# Altium PCB wifi_breakout_PCB.PcbDoc
Units mm, origin at the board's own origin, x right, y up, seen from the top; angles counter-clockwise.
Board outline 43.81 x 27.05 mm, 4 copper layers (Top Layer, GND, VCC, Bottom Layer), stack 0.605 mm thick; 6 components, 12 nets, 136 pads, 9 vias.
Unrouted connection lines stored in the file: 3.
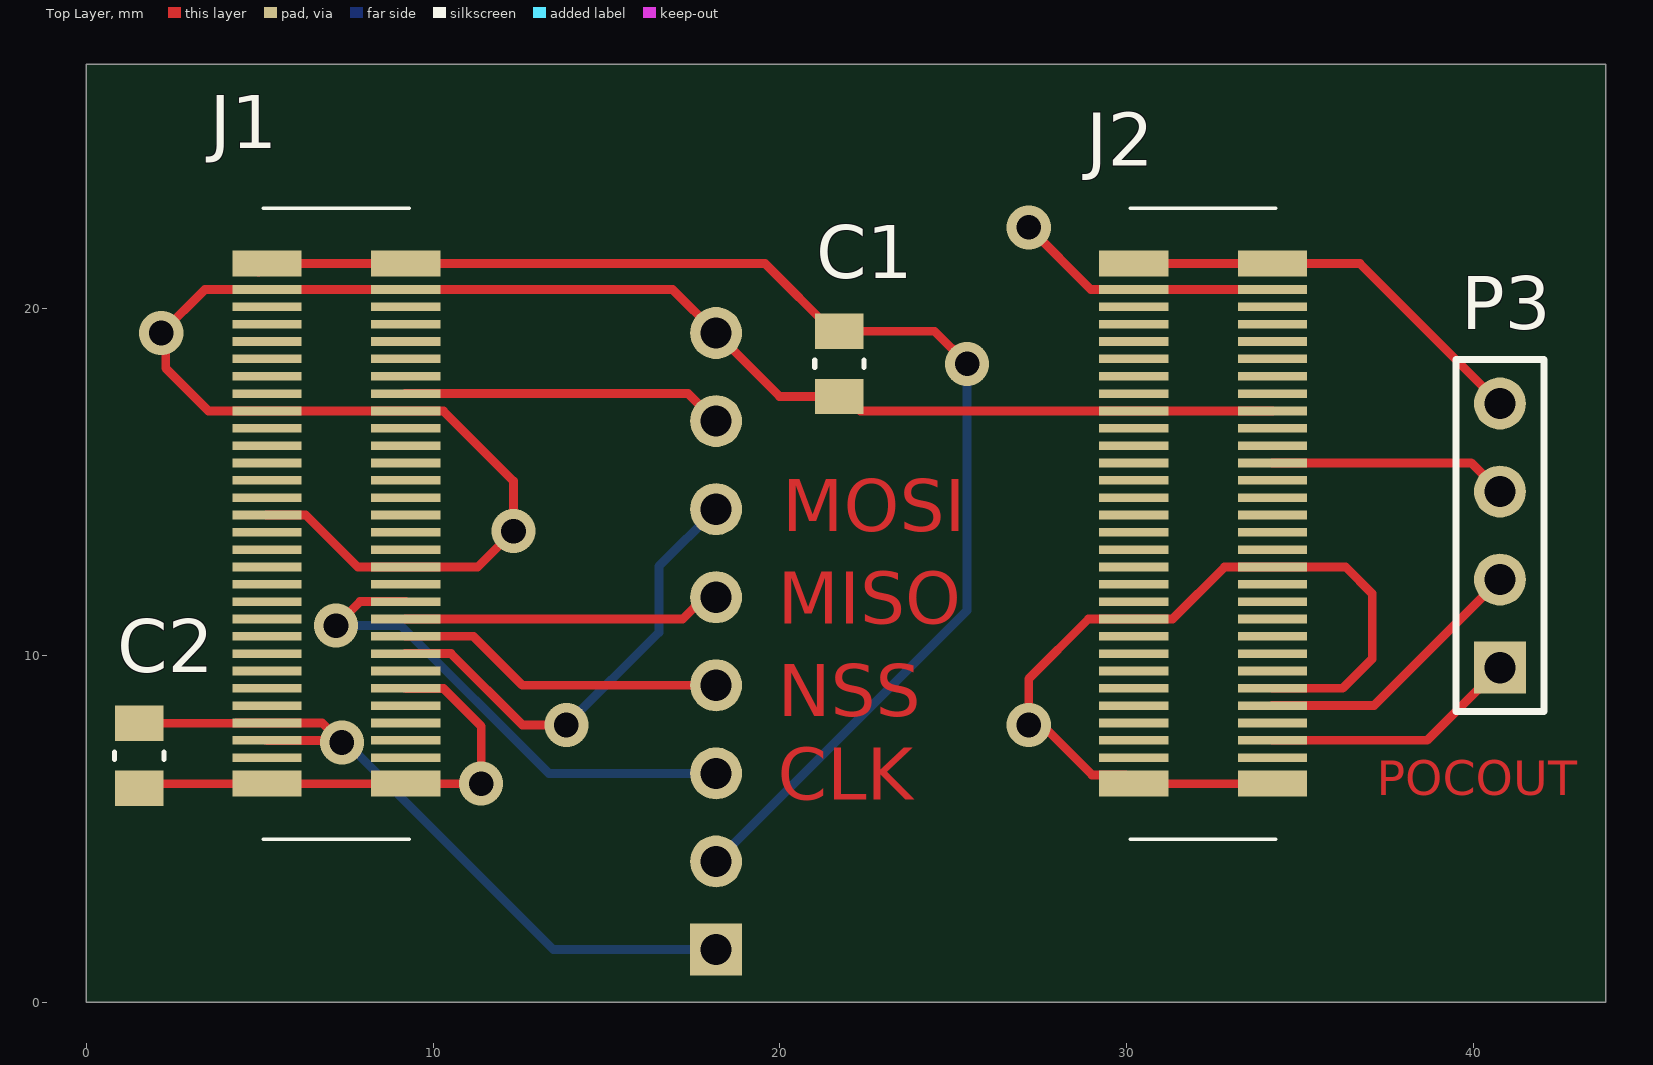
[diagram p0: Top Layer view]
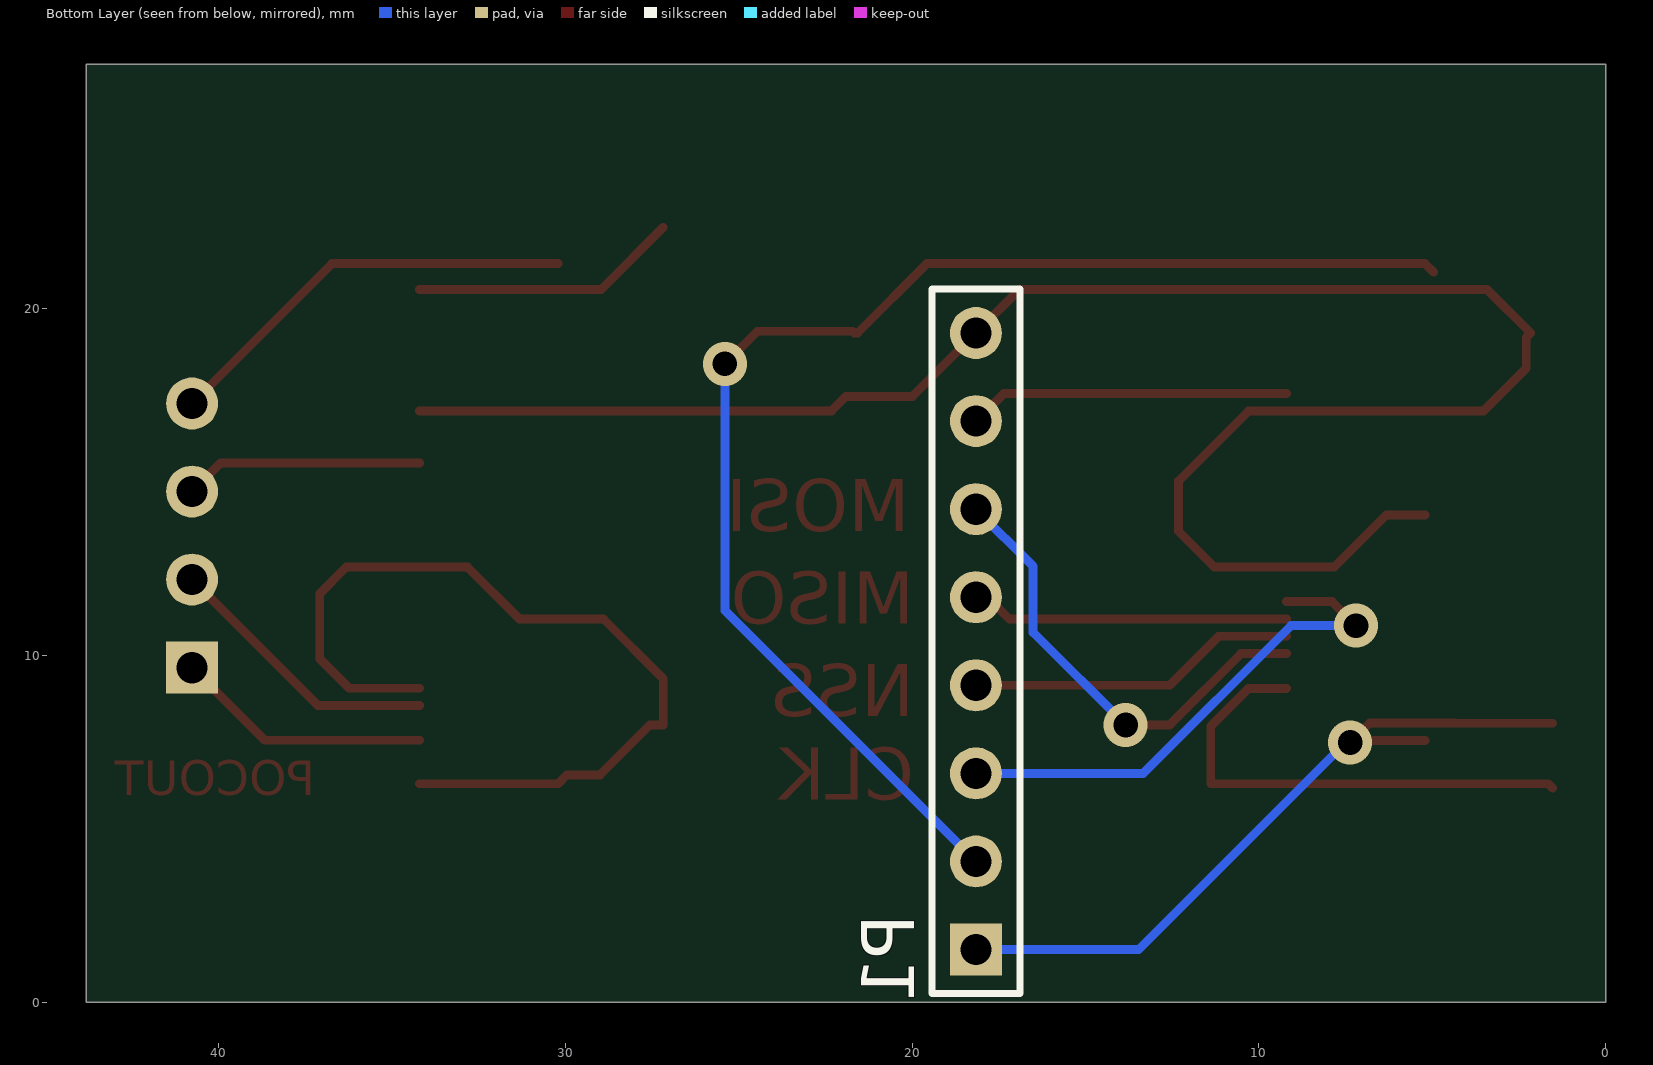
[diagram p1: Bottom Layer view, seen from below]
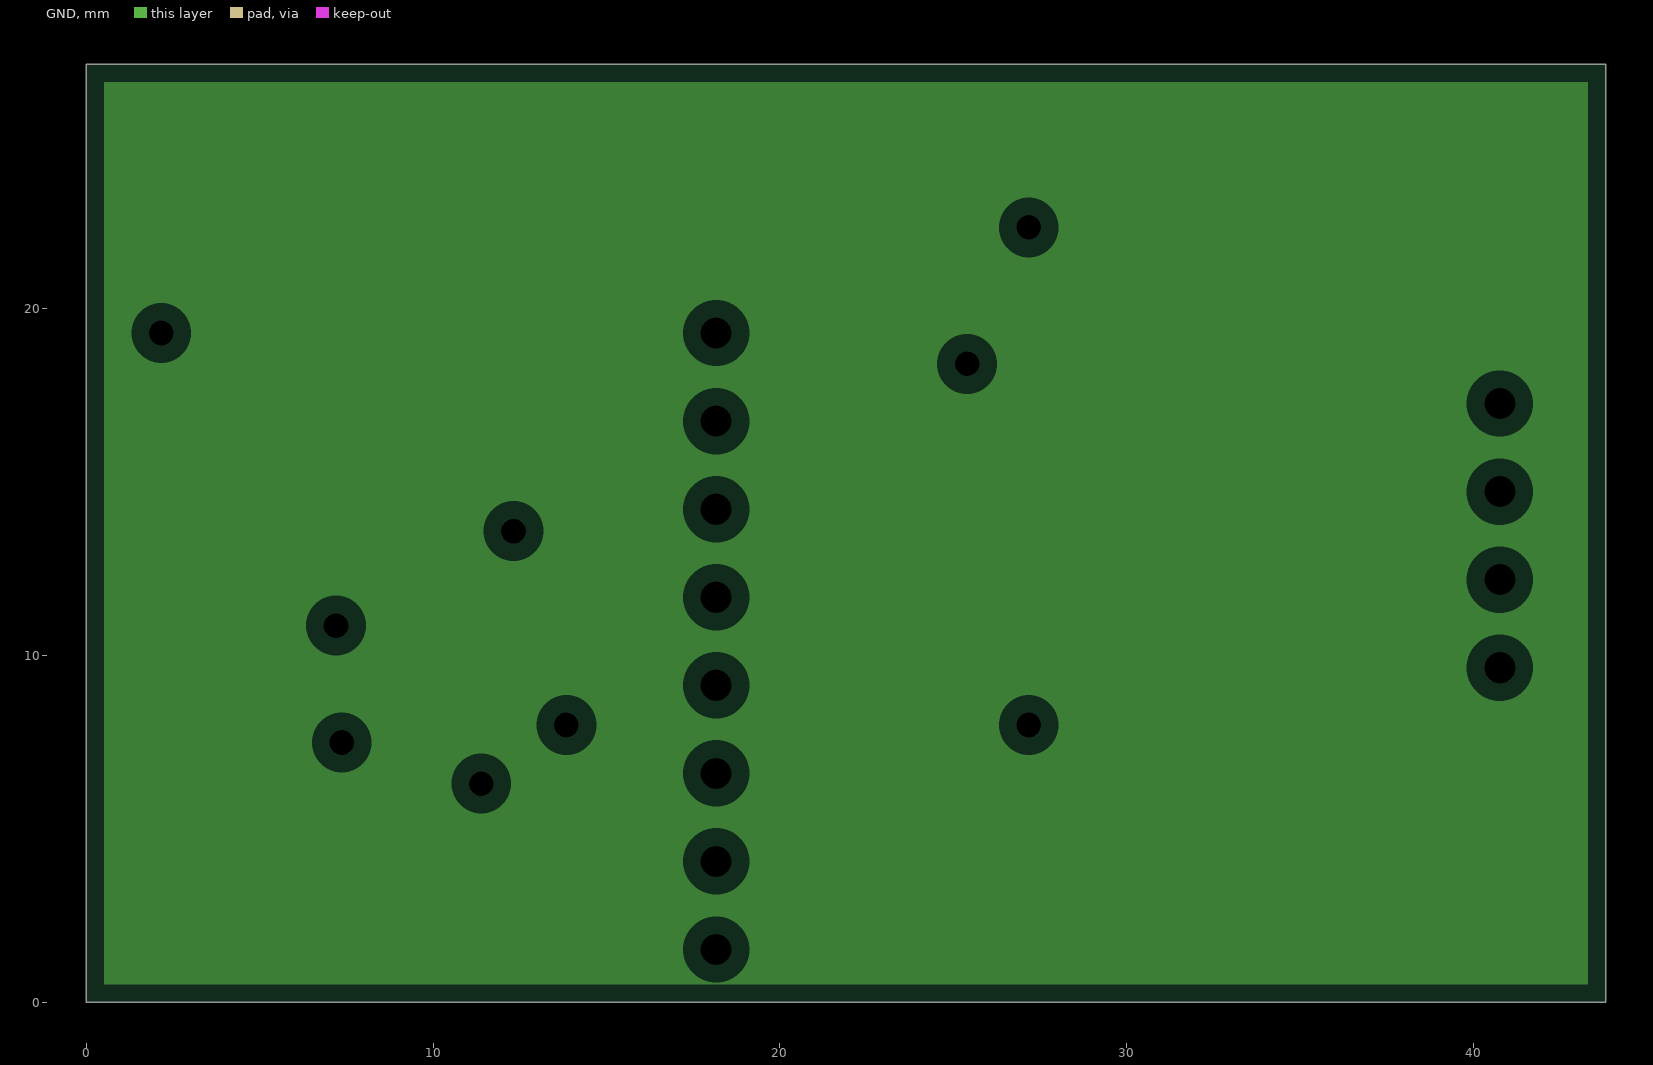
[diagram p2: GND, clearances drawn from the general rule]
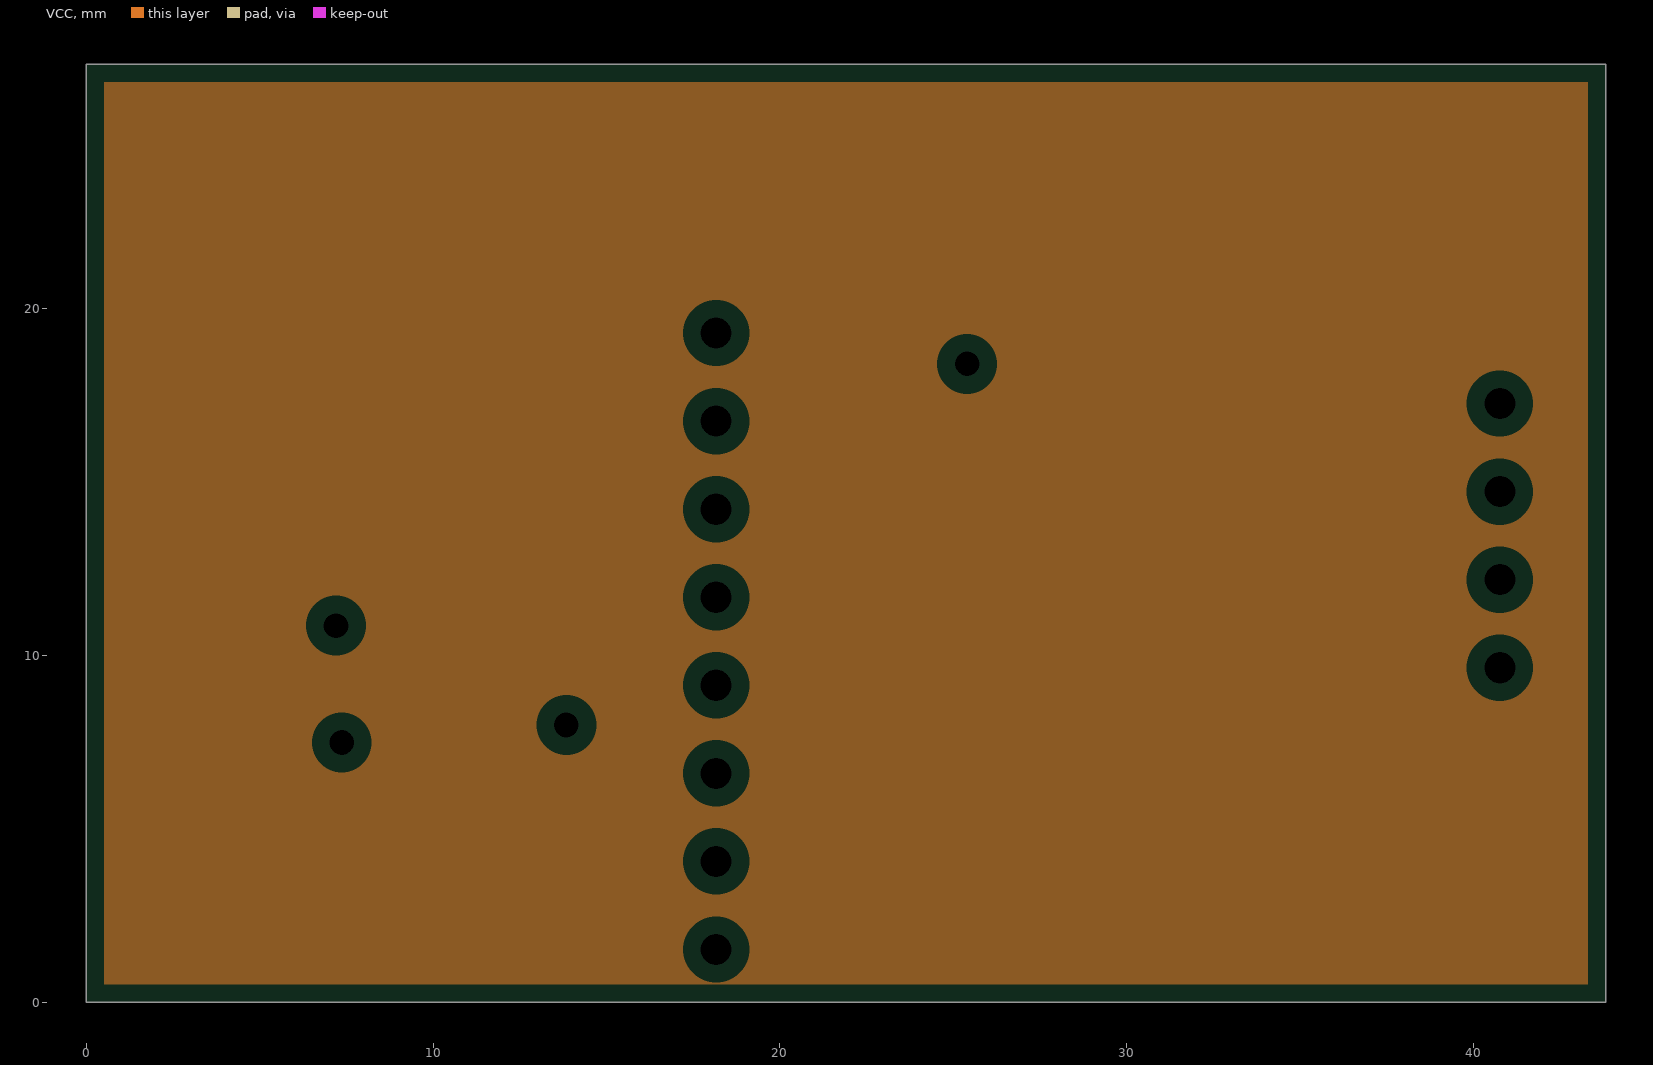
[diagram p3: VCC, clearances drawn from the general rule]

## Layer stack, top to bottom
Top Solder: solder mask 0.0102, Solder Resist, Dk 3.5
Top Layer: signal copper 0.0356
Dielectric 2: prepreg 0.0711, PP-006, Dk 4.1
GND: plane copper 0.036
Dielectric 1: dielectric 0.32, FR-4, Dk 4.8
VCC: plane copper 0.036
Dielectric 3: prepreg 0.0711, PP-006, Dk 4.1
Bottom Layer: signal copper 0.0356
Bottom Solder: solder mask 0.0102, Solder Resist, Dk 3.5

## Board outline
0,0 43.815,0 43.815,27.051 0,27.051

## Design rules (kind name [scope] priority, off if disabled: settings)
Clearance 0.2 [All] p1: gap=0.2 ignorepadtopadclearanceinfootprint=FALSE except(0: Arc-Hole Track-Hole SMDPad-Hole THPad-Hole Via-Hole Fill-Hole Poly-Hole Region-Hole Text-Hole; 0.125: SMDPad-SMDPad SMDPad-THPad THPad-THPad)
PlaneClearance [All] p1: clearance=0.508
PlaneConnect [All] p1: planeconnectstyle=Relief reliefexpansion=0.508 reliefentries=4 reliefconductorwidth=0.254 reliefairgap=0.254
PolygonConnect [All] p1: connectstyle=Relief reliefconductorwidth=0.254 reliefentries=4 polygonreliefangle="90 Angle" airgapwidth=0.254
RoutingVias [All] p1: holewidth=0.711 width=1.27 viastyle="Through Hole" minholewidth=0.711 minwidth=1.27 maxholewidth=0.711 maxwidth=1.27
SolderMaskExpansion [All] p1: expansion=0.102 istentingtop=FALSE
Width [All] p1: maxlimit=0.254 minlimit=0.254 preferedwidth=0.254
28 further rules are at their usual default settings.

## Components (designator, comment, footprint, x,y, rotation, side; value= is the part's Value field where it differs from the comment)
C1 "2.2uF" 0805 21.717,18.415 r270 top
C2 "2.2uF" 0805 1.524,7.112 r270 top
J1 "AXK6S60647YG" AXK6S60647YG 7.207,13.807 r270 top
J2 "AXK6S60647YG" AXK6S60647YG 32.207,13.807 r270 top
P1 "Header 8" HDR1X8 18.161,1.524 r90 bottom
P3 "Header 4" HDR1X4 40.767,9.652 r90 top

## Footprints (in the part's own frame and the unit in brackets; to place one, negate y for a bottom-side part, rotate by r counter-clockwise, add the part's x,y. Pads: shape width x height; smd on the part's side, far side on the other; paste and mask are expansions set on the pad)
0805 [mil]
  rect 40x55 smd: 1(-37,0) 2(37,0)
  silkscreen extent -4,-28 4,28
AXK6S60647YG [mm]
  rect 0.75x2 smd: 1(-7.5,2) 2(-7.5,-2) 59(7.5,2) 60(7.5,-2)
  rect 0.25x2 smd: 3(-6.75,2) 4(-6.75,-2) 5(-6.25,2) 6(-6.25,-2) 7(-5.75,2) 8(-5.75,-2) 9(-5.25,2) 10(-5.25,-2) 11(-4.75,2) 12(-4.75,-2) 13(-4.25,2) 14(-4.25,-2) 15(-3.75,2) 16(-3.75,-2) 17(-3.25,2) 18(-3.25,-2) 19(-2.75,2) 20(-2.75,-2) 21(-2.25,2) 22(-2.25,-2) 23(-1.75,2) 24(-1.75,-2) 25(-1.25,2) 26(-1.25,-2) 27(-0.75,2) 28(-0.75,-2) 29(-0.25,2) 30(-0.25,-2) 31(0.25,2) 32(0.25,-2) 33(0.75,2) 34(0.75,-2) 35(1.25,2) 36(1.25,-2) 37(1.75,2) 38(1.75,-2) 39(2.25,2) 40(2.25,-2) 41(2.75,2) 42(2.75,-2) 43(3.25,2) 44(3.25,-2) 45(3.75,2) 46(3.75,-2) 47(4.25,2) 48(4.25,-2) 49(4.75,2) 50(4.75,-2) 51(5.25,2) 52(5.25,-2) 53(5.75,2) 54(5.75,-2) 55(6.25,2) 56(6.25,-2) 57(6.75,2) 58(6.75,-2)
  silkscreen extent -9.1,-2.1 9.1,2.1, body extent -9.1,-2.97 9.1,2.98, height 5.6
HDR1X4 [mm] "Connector; Header; 4 Position"
  rect 1.5x1.5 hole 0.9: 1(0,0)
  round 1.5 hole 0.9: 2(2.54,0) 3(5.08,0) 4(7.62,0)
  silkscreen extent -1.27,-1.27 8.89,1.27
HDR1X8 [mm] "Connector; Header; 8 Position"
  rect 1.5x1.5 hole 0.9: 1(0,0)
  round 1.5 hole 0.9: 2(2.54,0) 3(5.08,0) 4(7.62,0) 5(10.16,0) 6(12.7,0) 7(15.24,0) 8(17.78,0)
  silkscreen extent -1.27,-1.27 19.05,1.27

## Part data
C1 C2: library part "CAP 2.2uF 0805", "CAP CER 1UF 50V X7R 0805", Package=0805, Rating=16V, Tolerance=10%, Digikey=399-3523-1-ND, Digikey Link=https://www.digikey.ca/products/en?keywords=399-3523-1-ND, MF=KEMET, MP=C0805C225K4RACTU, Price="0,461 CAD"
J1 J2: "Redpine module connector"
P1: "Header, 8-Pin", LatestRevisionDate=17-Jul-2002, LatestRevisionNote="Re-released for DXP Platform.", Publisher="Altium Limited"
P3: "Header, 4-Pin", LatestRevisionDate=17-Jul-2002, LatestRevisionNote="Re-released for DXP Platform.", Publisher="Altium Limited"

## Via types
v1: diameter 1.27, hole 0.711, Top Layer to GND, 5 vias
v2: diameter 1.27, hole 0.711, Top Layer to Bottom Layer, 4 vias

## Nets (pads, with @x,y where several pads share a name; then routed paths per layer and width w, separated by ;. In a path a pad name is that pad's centre, name@x,y a point inside that pad or via, vN(x,y) a via of type N, cw(c..) or ccw(c..) an arc to the next point about the centre after c; other vN are vias at no path point)
CLK: J1.39 P1.3 | length 15
  Top Layer w0.254: v2(7.199,10.865) 7.891,11.557 J1.39 J1.39@9.209,11.559
  Bottom Layer w0.254: v2(7.199,10.865) 9.074,10.865 13.335,6.604 P1.3
GND: C1.2 C2.2 J1.3 J1.4 J1.17 J1.18 J1.30 J1.35 J1.49 J1.59 J1.60 J2.3 J2.4 J2.17 J2.18 J2.35 J2.42 J2.49 J2.59 J2.60 P1.8 | length 103.8
  Top Layer w0.254: C2.2 1.659,6.307 J1.60 J1.59 v1(11.387,6.307) 11.387,7.964 10.296,9.055 9.209,9.055 J1.49 ; J1.30 5.209,14.055 6.328,14.055 7.826,12.557 J1.35 11.287,12.557 v1(12.319,13.589) 12.319,15.032 10.296,17.055 9.209,17.055 J1.17 J1.18 3.517,17.057 2.286,18.288 2.286,19.177 v1(2.159,19.304) 3.412,20.557 J1.4 J1.3 9.209,20.555 9.211,20.557 16.908,20.557 P1.8 19.99,17.475 C1.2 21.907,17.475 22.326,17.057 J2.18 J2.17 ; v1(27.178,22.352) 28.973,20.557 J2.4 J2.3 ; J2.59 J2.60 29.959,6.555 29.005,6.555 27.559,8.001 v1(27.178,8.001) 27.178,9.333 28.902,11.057 J2.42 30.209,11.059 31.328,11.059 32.826,12.557 J2.35 36.316,12.557 37.084,11.789 37.084,9.906 36.235,9.057 J2.49
INT: J1.15 P1.7 | length 9.3
  Top Layer w0.254: J1.15 17.355,17.557 18.148,16.764 P1.7
MISO: J1.41 P1.5 | length 9.4
  Top Layer w0.254: J1.41 17.197,11.057 17.824,11.684 P1.5 P1.5@18.036,11.559
MOSI: J1.45 P1.6 | length 13.5
  Top Layer w0.254: J1.45@9.209,10.055 J1.45 10.517,10.057 12.573,8.001 v2(13.843,8.001)
  Bottom Layer w0.254: v2(13.843,8.001) 16.51,10.668 16.51,12.573 P1.6
NetC2_1: C2.1 J1.54 J1.56 P1.1 | length 21.4
  Top Layer w0.254: C2.1 4.331,8.052 4.336,8.057 J1.54 6.802,8.057 v2@7.304,7.555 ; J1.56 5.209,7.555 v2@7.304,7.555 ; v2(7.366,7.493) v2@7.304,7.555
  Bottom Layer w0.254: v2(7.366,7.493) 7.493,7.493 13.462,1.524 P1.1
NetJ2_1: J2.1 J2.2 P3.4 | length 12.2
  Top Layer w0.254: J2.2 J2.1 36.732,21.307 P3.4
NetJ2_51: J2.51 P3.2 | length 8.1
  Top Layer w0.254: J2.51 37.132,8.557 P3.2
NetJ2_55: J2.55 P3.1 | length 7.4
  Top Layer w0.254: J2.55 38.672,7.557 P3.1
NSS: J1.43 P1.4 | length 9.5
  Top Layer w0.254: J1.43 11.16,10.557 12.573,9.144 P1.4
RESET: J2.23 P3.3 | length 6.9
  Top Layer w0.254: J2.23 39.942,15.557 P3.3
VCC: C1.1 J1.1 J1.2 P1.2 | length 39.1
  Top Layer w0.254: J1.2@4.959,21.059 J1.2 J1.1 19.574,21.307 21.577,19.304 21.666,19.304 C1.1 24.46,19.355 v2(25.4,18.415)
  Bottom Layer w0.254: P1.2 25.4,11.303 v2(25.4,18.415)
pads on no net: J1.5 J1.6 J1.7 J1.8 J1.9 J1.10 J1.11 J1.12 J1.13 J1.14 J1.16 J1.19 J1.20 J1.21 J1.22 J1.23 J1.24 J1.25 J1.26 J1.27 J1.28 J1.29 J1.31 J1.32 J1.33 J1.34 J1.36 J1.37 J1.38 J1.40 J1.42 J1.44 J1.46 J1.47 J1.48 J1.50 J1.51 J1.52 J1.53 J1.55 J1.57 J1.58 J2.5 J2.6 J2.7 J2.8 J2.9 J2.10 J2.11 J2.12 J2.13 J2.14 J2.15 J2.16 J2.19 J2.20 J2.21 J2.22 J2.24 J2.25 J2.26 J2.27 J2.28 J2.29 J2.30 J2.31 J2.32 J2.33 J2.34 J2.36 J2.37 J2.38 J2.39 J2.40 J2.41 J2.43 J2.44 J2.45 J2.46 J2.47 J2.48 J2.50 J2.52 J2.53 J2.54 J2.56 J2.57 J2.58

## Polygon pours and split planes (outlines as drawn)
no net on GND (split plane): 43.305,0.51 0.51,0.51 0.51,26.541 43.305,26.541
no net on VCC (split plane): 43.305,0.51 0.51,0.51 0.51,26.541 43.305,26.541

## Other copper
Top Layer:
  text "MOSI" at 20.066,13.589 h1.5
  text "MISO" at 19.939,10.922 h1.5
  text "NSS" at 19.939,8.255 h1.5
  text "POCOUT" at 37.211,5.969 h1
  text "CLK" at 19.939,5.842 h1.5